# EAGLE board ATtiny861devbrdtst1 (EAGLE 5.06)

Size 160 x 100 mm. Coordinates in mm from the lower left corner, seen from the top.
Outline: 0,0 160,0 160,100 0,100 0,0
Copper layers (1*16): Top 0.035mm / dielectric 1.5mm / Bottom 0.035mm
Design rules "default": minimum track width 10mil, minimum drill 24mil, track to track 8mil, track to pad 8mil, pad to pad 8mil, via to via 8mil, smd to smd 8mil, copper to edge 40mil, drill to drill 8mil, minimum pad ring 10mil, minimum via ring 8mil, stop-mask expansion 4mil, vias tented up to drill 0mil, thermal gap 10mil

## Footprints (pad centres in the part's own frame; a part is rotated, then mirrored left to right if it is on the bottom)
PANASONIC_C = smd 2.2 x 0.65: + 1.9,-0.2; - -1.8,-0.2
C1206K = smd 1.5 x 2: 1 -1.5,0; 2 1.5,0
DIODE-HV = smd 2.2 x 2.4: A 2.454,0; C -2.454,0
SOT23 = smd 1 x 1.4: 1 -0.95,-1.1; 2 0.95,-1.1; 3 0,1.1
DPACK = smd 1.6 x 3: 1 -2.28,-4.8; 3 2.28,-4.8 | smd 5.8 x 6.2: 4 0,2.38
DIL20 = drill 0.813 long: 1 -11.43,-3.81; 2 -8.89,-3.81; 3 -6.35,-3.81; 4 -3.81,-3.81; 5 -1.27,-3.81; 6 1.27,-3.81; 7 3.81,-3.81; 8 6.35,-3.81; 9 8.89,-3.81; 10 11.43,-3.81; 11 11.43,3.81; 12 8.89,3.81; 13 6.35,3.81; 14 3.81,3.81; 15 1.27,3.81; 16 -1.27,3.81; 17 -3.81,3.81; 18 -6.35,3.81; 19 -8.89,3.81; 20 -11.43,3.81
POWER_JACK_PTH = drill 2.997 round: GND 0,7.7; GNDBREAK 4.7,10.7; PWR 0,13.7
1X04 = drill 1.016 pad 1.88 square: 1 0,0 | drill 1.016 pad 1.88 round: 2 2.54,0; 3 5.08,0; 4 7.62,0
1X08_LONGPADS = drill 1.016 pad 1.88 long: 1 0,0; 2 2.54,0; 3 5.08,0; 4 7.62,0; 5 10.16,0; 6 12.7,0; 7 15.24,0; 8 17.78,0
2X3_OFFSET = drill 1.016 pad 1.88 offset: 1 0,0; 2 0,2.54; 3 2.54,0; 4 2.54,2.54; 5 5.08,0; 6 5.08,2.54
1X06_LONGPADS = drill 1.016 pad 1.88 long: 1 0,0; 2 2.54,0; 3 5.08,0; 4 7.62,0; 5 10.16,0; 6 12.7,0
HC49U-V = drill 0.813 round: 1 -2.413,0; 2 2.413,0
1206 = smd 1.6 x 1.8: 1 -1.4,0; 2 1.4,0
TACTILE-PTH = drill 1.016 pad 1.88 round: 1 -3.251,2.261; 2 3.251,2.261; 3 -3.251,-2.261; 4 3.251,-2.261
USB-B-PTH = drill 0.914 pad 1.676 round: D+ 0,1.25; D- 1.981,1.25; GND 0,-1.25; VBUS 1.981,-1.25 | drill 2.286 round: P$1 -2.718,-6.02; P$2 -2.718,6.02

## Placement (x,y rotation side)
C1  .1uF  [PANASONIC_C]  38.1,96.52 0 top
C2  .1uF  [PANASONIC_C]  38.1,88.9 0 top
C3  22pF  [C1206K]  7.62,66.04 180 top
C4  22pF  [C1206K]  5.08,59.69 0 top
C5  .1uF  [PANASONIC_C]  29.21,80.01 0 top
D1  512-S1A  [DIODE-HV]  19.05,88.9 0 top
D2  512-S1A  [DIODE-HV]  19.05,95.25 180 top
D3  3.6V  [SOT23]  15.24,76.2 0 top
D4  3.6V  [SOT23]  15.24,81.28 0 top
IC1  LM317  [DPACK]  29.21,90.17 180 top
IC2  ATtiny861  [DIL20]  59.69,52.07 270 top
J1  DCIN  [POWER_JACK_PTH]  -3.81,93.98 270 top
JP1  i2c  [1X04]  86.36,80.01 90 top
JP2  IO  [1X08_LONGPADS]  81.28,59.69 270 top
JP3  ISP  [2X3_OFFSET]  55.88,85.09 270 top
JP4  5V  [1X06_LONGPADS]  72.39,72.39 0 top
JP5  GND  [1X06_LONGPADS]  72.39,67.31 0 top
Q1  20Mhz  [HC49U-V]  15.24,63.5 90 top
R1  240  [1206]  21.59,78.74 0 top
R2  715  [1206]  21.59,82.55 180 top
R3  68  [1206]  21.59,74.93 0 top
R4  68  [1206]  21.59,71.12 0 top
R5  1K5  [1206]  13.97,71.12 180 top
R6  10K  [1206]  43.18,48.26 0 top
R7  4K7  [1206]  77.47,85.09 0 top
R8  4K7  [1206]  77.47,81.28 0 top
S1  RESET  [TACTILE-PTH]  30.48,72.39 180 top
X1  USBPTH  [USB-B-PTH]  7.62,77.47 0 top

## Library data of the parts
C1 C2 C5 D1 D2 J1 JP1-JP5 R1-R8 S1 X1 = SparkFun-2009-11-03
C3 C4 = resistor
D3 D4 = diode
IC1 = v-reg
IC2 = avr-6
Q1 = SparkFun

## Nets
5V: C2.+ C5.+ IC1.4 IC2.5 IC2.15 JP1.4 JP3.2 JP4.1 JP4.2 JP4.3 JP4.4 JP4.5 JP4.6 R1.2 R5.2 R6.1 R7.2 R8.2 X1.VBUS
GND: C1.- C2.- C3.2 C4.1 C5.- D1.A D3.1 D4.1 IC2.6 IC2.16 JP1.1 JP3.6 JP5.1 JP5.2 JP5.3 JP5.4 JP5.5 JP5.6 R2.1 S1.3 S1.4 X1.GND
MISO: IC2.2 JP3.1
MOSI/SDA: IC2.1 JP3.4
N$1: D2.A J1.PWR
N$2: C1.+ D2.C IC1.3
N$3: D1.C J1.GND J1.GNDBREAK
N$5: D3.3 R3.1 R5.1 X1.D-
N$6: IC1.1 R1.1 R2.2
N$8: C3.1 IC2.7 Q1.2
N$9: D4.3 R4.1 X1.D+
N$10: C4.2 IC2.8 Q1.1
N$11: JP1.3 R7.1
N$12: JP1.2 R8.1
PA0: IC2.20 JP2.1
PA1: IC2.19 JP2.2
PA2: IC2.18 JP2.3
PA3: IC2.17 JP2.4
PA4: IC2.14 JP2.5
PA5: IC2.13 JP2.6
PA6: IC2.12 JP2.7
PA7: IC2.11 JP2.8
RESET: IC2.10 JP3.5 R6.2 S1.1 S1.2
SCK/SCL: IC2.3 JP3.3
USBD+: IC2.9 R4.2
USBD-: IC2.4 R3.2

## Tracks (layer width: path | path; a pad name or v marks a point on that pad's centre or on a via)
5V  (18 unrouted)
GND  (21 unrouted)
MISO  (1 unrouted)
MOSI/SDA  (1 unrouted)
N$1  (1 unrouted)
N$2  (2 unrouted)
N$3  (2 unrouted)
N$5  (3 unrouted)
N$6  (2 unrouted)
N$8  (2 unrouted)
N$9  (2 unrouted)
N$10  (2 unrouted)
N$11  (1 unrouted)
N$12  (1 unrouted)
PA0  (1 unrouted)
PA1  (1 unrouted)
PA2  (1 unrouted)
PA3  (1 unrouted)
PA4  (1 unrouted)
PA5  (1 unrouted)
PA6  (1 unrouted)
PA7  (1 unrouted)
RESET  (4 unrouted)
SCK/SCL  (1 unrouted)
USBD+  (1 unrouted)
USBD-  (1 unrouted)